# Altium PCB e3_tp2_ej1.PcbDoc
Units mm, origin at the board's own origin, x right, y up, seen from the top; angles counter-clockwise.
Board outline 50.04 x 49.91 mm, 2 copper layers (Top Layer, Bottom Layer); 13 components, 10 nets, 30 pads, 0 vias.
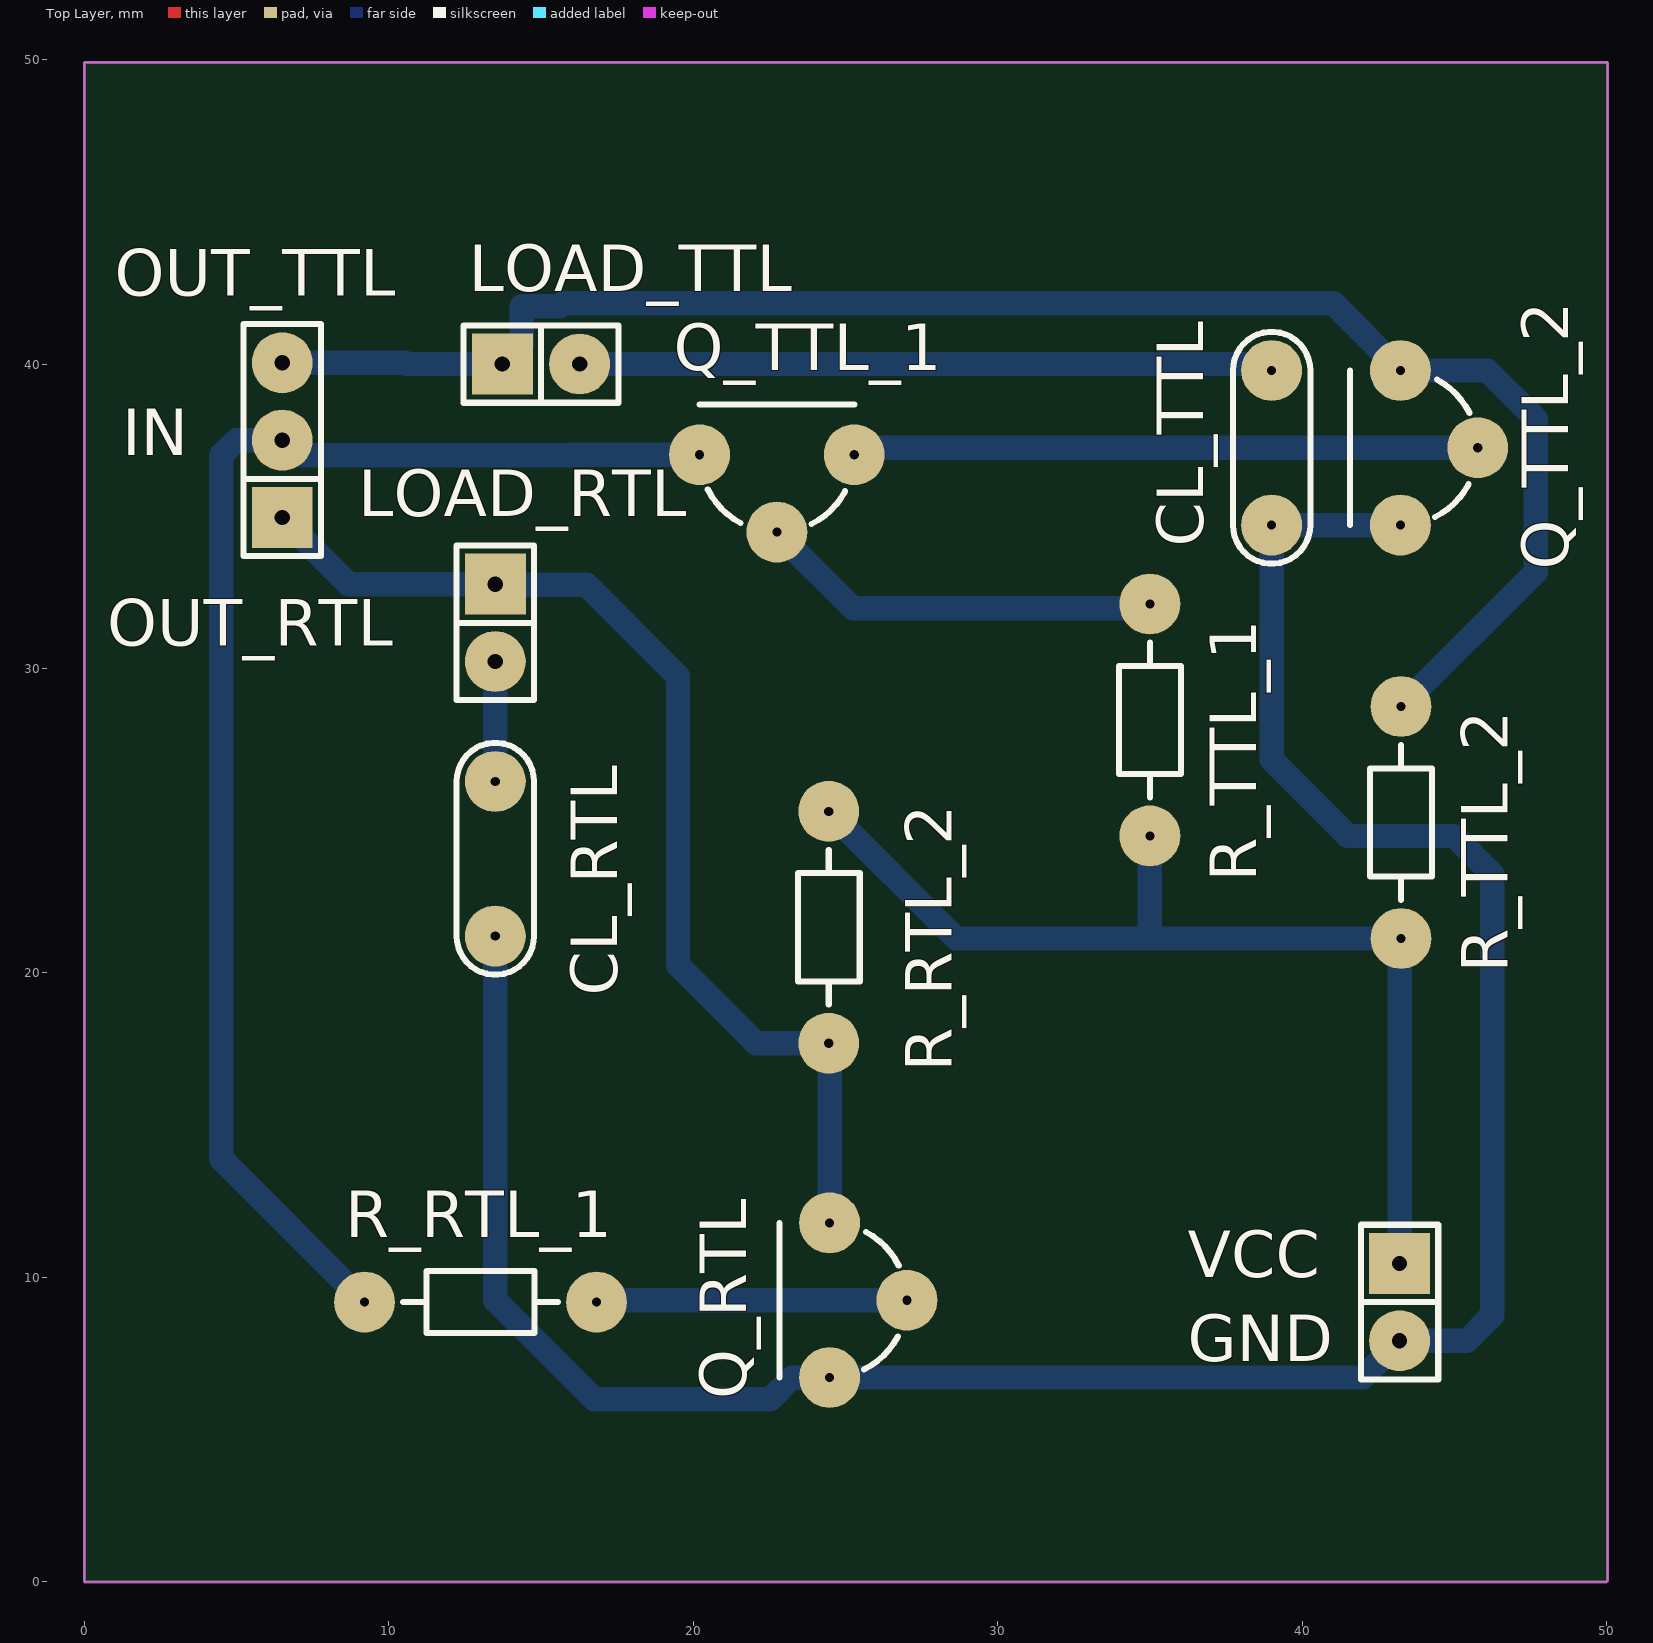
[diagram p0: Top Layer view]
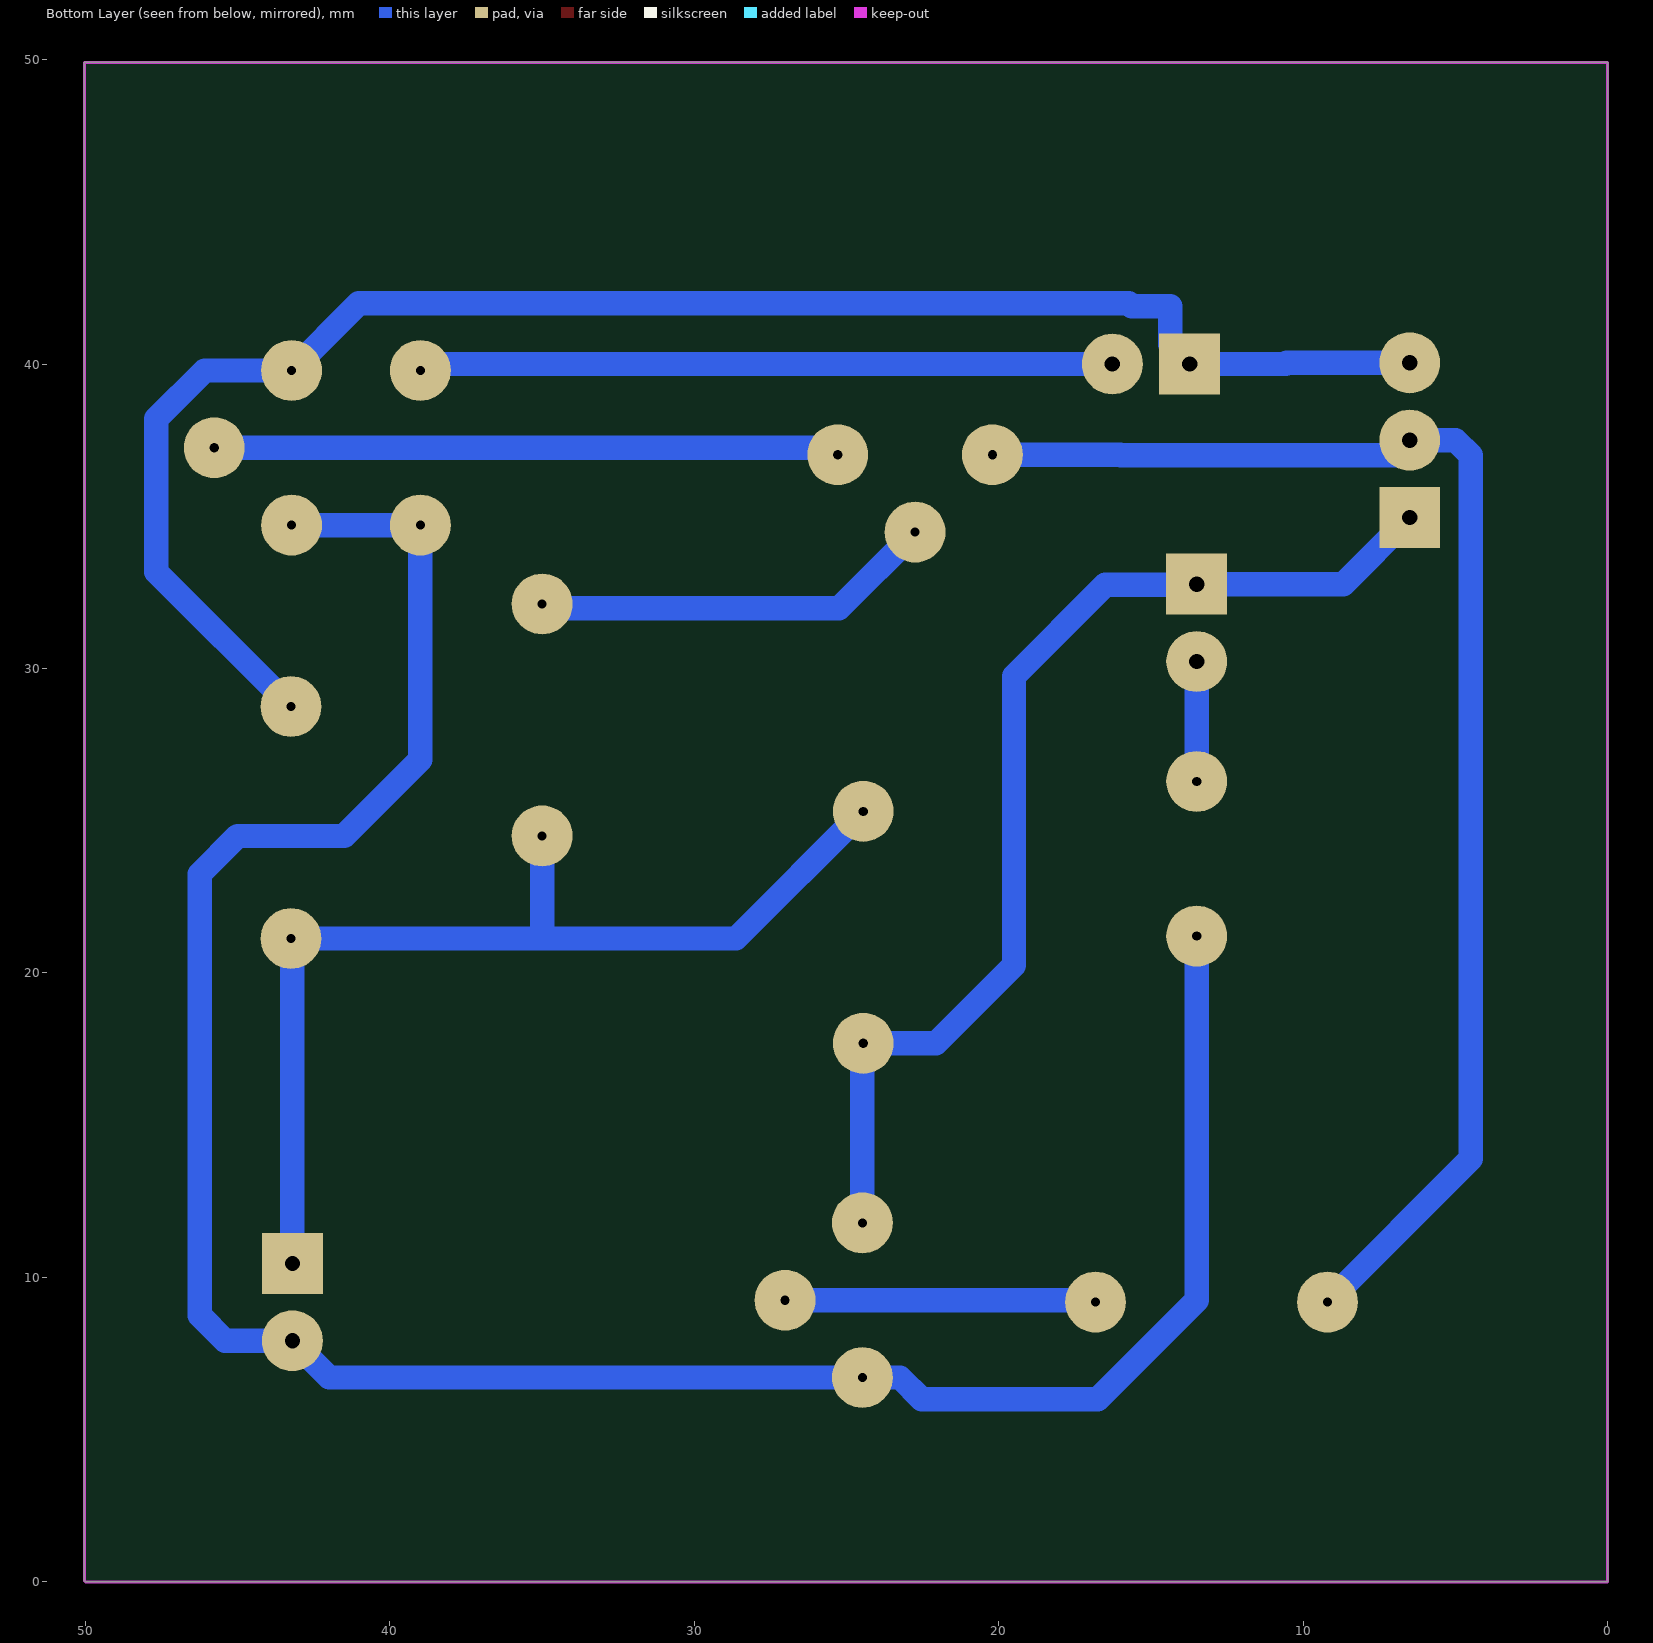
[diagram p1: Bottom Layer view, seen from below]
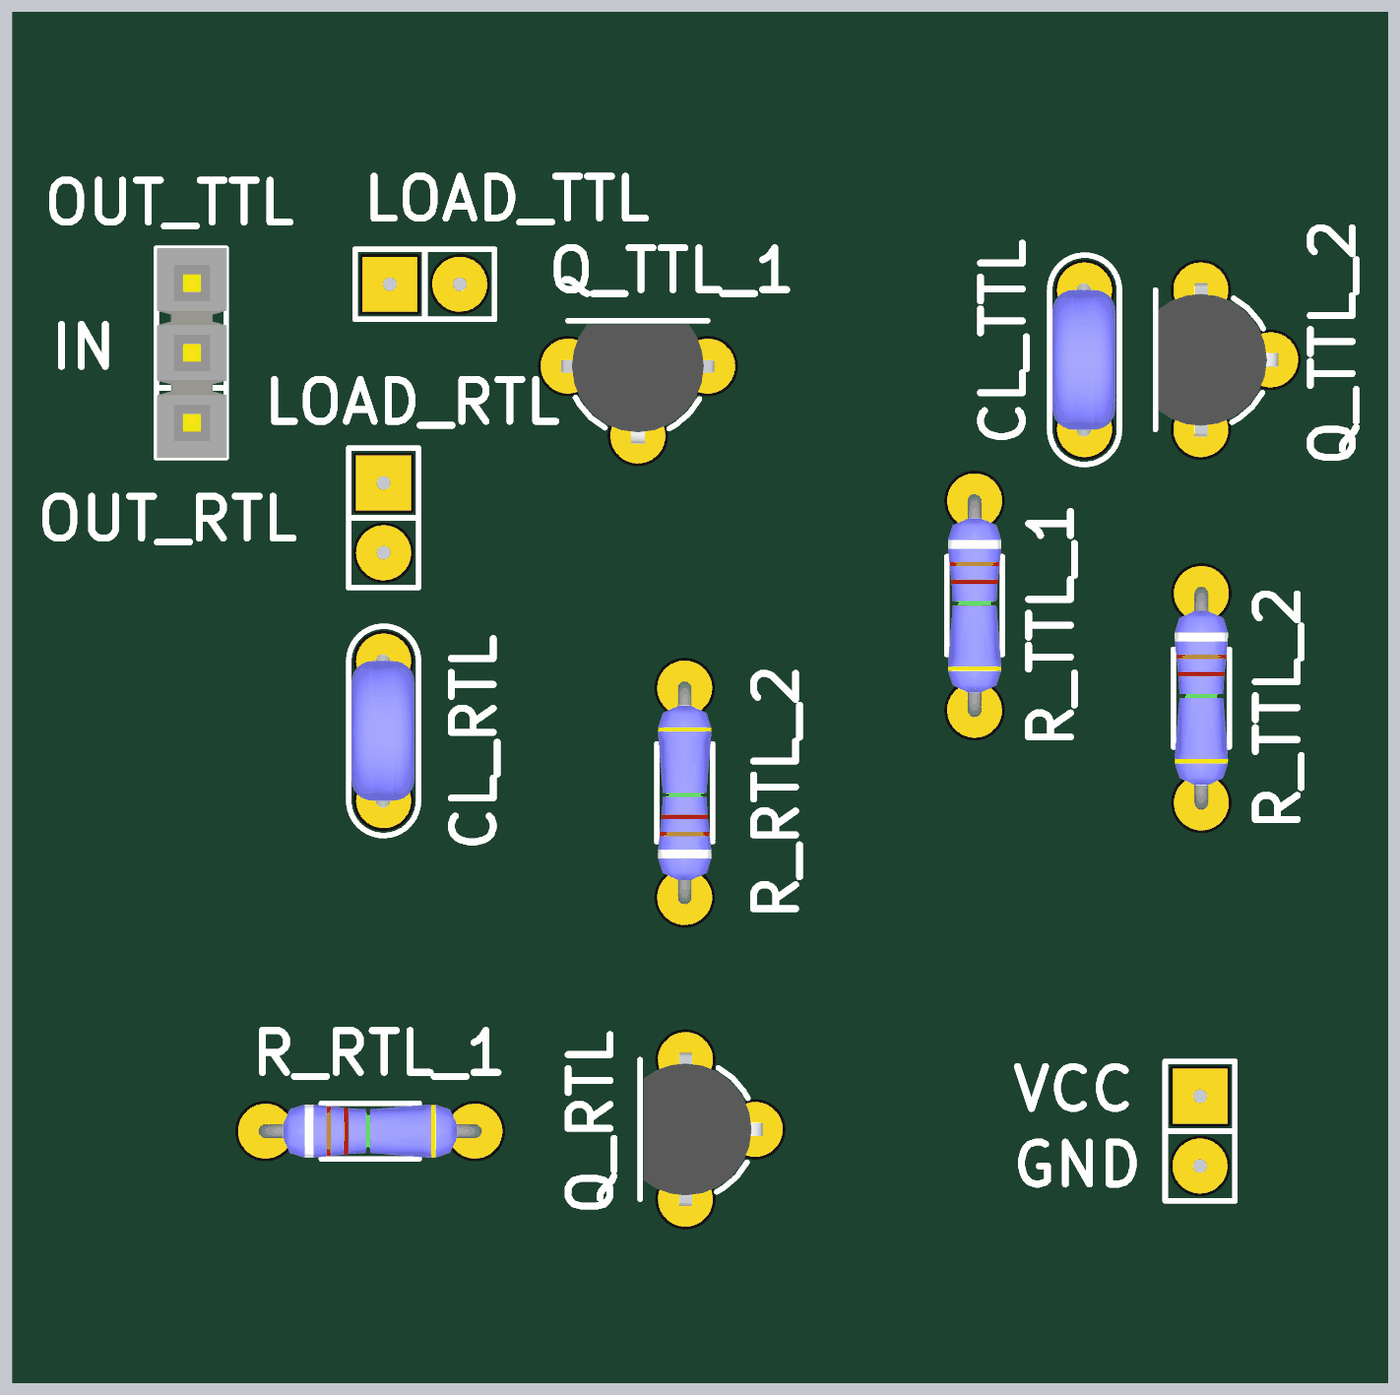
[diagram p2: 3D render of the assembled board from above, using the file's embedded part models]

## Layer stack, top to bottom
Top Solder: solder mask 0.0102, Solder Resist, Dk 3.5
Top Layer: signal copper 0.0356
Dielectric 1: dielectric 0.32, FR-4, Dk 4.8
Bottom Layer: signal copper 0.0356
Bottom Solder: solder mask 0.0102, Solder Resist, Dk 3.5

## Board outline
0,0 50,0 50.038,0.038 50.038,49.911 0,49.911

## Design rules (kind name [scope] priority, off if disabled: settings)
Clearance [All] p1: gap=0.5 ignorepadtopadclearanceinfootprint=FALSE
PolygonConnect [All] p1: connectstyle=Relief reliefconductorwidth=0.254 reliefentries=4 polygonreliefangle="90 Angle" airgapwidth=0.254
RoutingVias [All] p1: holewidth=2 width=0.5 viastyle="Through Hole" minholewidth=2 minwidth=0.5 maxholewidth=2 maxwidth=0.5
SolderMaskExpansion [All] p1: expansion=0.102
Width [All] p1: maxlimit=0.8 minlimit=0.8 preferedwidth=0.8
30 further rules are at their usual default settings.

## Components (designator, comment, footprint, x,y, rotation, side; value= is the part's Value field where it differs from the comment)
CL_RTL "CAP" CAP200 13.5,23.75 r270 top
CL_TTL "CAP" CAP200 39,37.25 r270 top
LOAD_RTL "CON2" SIP2 13.5,31.5 r270 top
LOAD_TTL "CON2" SIP2 15,40 r0 top
OUT_TTL "CON3" SIP3 6.5,37.5 r90 top (schematic designator inout)
Q_RTL "TRANSISTOR NPN" TO92 25.75,9.25 r90 top
Q_TTL_1 "TRANSISTOR NPN" TO92 22.75,35.75 r0 top
Q_TTL_2 "TRANSISTOR NPN" TO92 44.5,37.25 r90 top
R_RTL_1 "RES" RES300 9.203,9.188 r0 top
R_RTL_2 "RES" RES300 24.453,17.688 r90 top
R_TTL_1 "RES" RES300 35,32.12 r270 top
R_TTL_2 "RES" RES300 43.25,28.75 r270 top
VCC "CON2" SIP2 43.203,9.188 r270 top (schematic designator alimentacion)

## Footprints (in the part's own frame and the unit in brackets; to place one, negate y for a bottom-side part, rotate by r counter-clockwise, add the part's x,y. Pads: shape width x height; smd on the part's side, far side on the other; paste and mask are expansions set on the pad)
CAP200 [mm]
  round 2 hole 0.3: 1(-2.54,0) 2(2.54,0)
  silkscreen extent -3.81,-1.27 3.81,1.27, body extent -2.79,-1.17 2.79,1.12, height 6.24
RES300 [mm]
  round 2 hole 0.3: 1(0,0) 2(7.62,0)
  silkscreen extent 1.27,-1.02 6.35,1.02, body extent -0.25,-0.97 7.87,0.97, height 2.01
SIP2 [mm]
  rect 2x2 hole 0.5: 1(-1.27,0)
  round 2 hole 0.5: 2(1.27,0)
  silkscreen extent -2.54,-1.27 2.54,1.27
SIP3 [mm]
  rect 2x2 hole 0.5: 1(-2.54,0)
  round 2 hole 0.5: 2(0,0) 3(2.54,0)
  silkscreen extent -3.81,-1.27 3.81,1.27, body extent -3.81,-1.3 3.81,1.24, height 8.38
TO92 [mm]
  round 2 hole 0.3: 1(0,-1.27) 2(2.54,1.27) 3(-2.54,1.27)
  silkscreen extent -2.54,-1 2.54,2.92, body extent -2.79,-1.55 2.79,2.79, height 8

## Nets (pads, with @x,y where several pads share a name; then routed paths per layer and width w, separated by ;. In a path a pad name is that pad's centre, name@x,y a point inside that pad or via, vN(x,y) a via of type N, cw(c..) or ccw(c..) an arc to the next point about the centre after c; other vN are vias at no path point)
GND: CL_RTL.2 CL_TTL.2 Q_RTL.3 Q_TTL_2.3 VCC.2 | length 82.4
  Bottom Layer w0.8: CL_RTL.2 13.5,9.25 16.75,6 22.535,6 23.245,6.71 Q_RTL.3 41.995,6.71 VCC.2 45.418,7.918 46.25,8.75 46.25,23.25 45,24.5 41.5,24.5 39,27 CL_TTL.2 Q_TTL_2.3
IN: OUT_TTL.2 Q_TTL_1.3 R_RTL_1.1 | length 45.9
  Bottom Layer w0.8: R_RTL_1.1 4.5,13.891 4.5,37 5,37.5 OUT_TTL.2 7,37 16,37 16.02,37.02 Q_TTL_1.3
NetCL_RTL_1: CL_RTL.1 LOAD_RTL.2 | length 3.9
  Bottom Layer w0.8: CL_RTL.1 LOAD_RTL.2
NetCL_TTL_1: CL_TTL.1 LOAD_TTL.2 | length 22.8
  Bottom Layer w0.8: LOAD_TTL.2 38.79,40 CL_TTL.1
NetQ_RTL_1: Q_RTL.1 R_RTL_1.2 | length 10.2
  Bottom Layer w0.8: R_RTL_1.2 16.885,9.25 Q_RTL.1
NetQ_TTL_1_1: Q_TTL_1.1 R_TTL_1.1 | length 13.4
  Bottom Layer w0.8: Q_TTL_1.1 25.25,31.98 34.86,31.98 R_TTL_1.1 R_TTL_1.1@35,32.1
NetQ_TTL_1_2: Q_TTL_1.2 Q_TTL_2.1 | length 20.6
  Bottom Layer w0.8: Q_TTL_1.2 25.52,37.25 Q_TTL_2.1
RTL_OUT: LOAD_RTL.1 OUT_TTL.1 Q_RTL.2 R_RTL_2.1 | length 36.8
  Bottom Layer w0.8: OUT_TTL.1 8.69,32.77 LOAD_RTL.1 13.77,32.5 14.02,32.75 16.5,32.75 19.5,29.75 19.5,20.25 22.062,17.688 R_RTL_2.1 24.48,17.661 Q_RTL.2
TTL_OUT: LOAD_TTL.1 OUT_TTL.3 Q_TTL_2.2 R_TTL_2.1 | length 55.6
  Bottom Layer w0.8: OUT_TTL.3 10.54,40.04 10.58,40 LOAD_TTL.1 14.37,40.64 14.37,41.9 15.63,41.9 15.73,42 41.02,42 Q_TTL_2.2 46.087,39.79 47.67,38.207 47.67,33.17 R_TTL_2.1
VCC: R_RTL_2.2 R_TTL_1.2 R_TTL_2.2 VCC.1 | length 34.4
  Bottom Layer w0.8: R_RTL_2.2 28.631,21.13 35,21.13 ; R_TTL_1.2 35,21.13 ; VCC.1 43.203,20.927 43,21.13 35,21.13

## Keep-outs
Keep-Out Layer:
  the board outline again, w0.1

## Silkscreen, mask and mechanical layers (free items; w line width, h text height)
Top Overlay:
  text "IN" at 1.25,37 h1.52
  text "OUT_RTL" at 0.75,30.75 h1.52
  text "GND" at 36.25,7.25 h1.52